# Altium PCB 12V_IdealDiode_PowerSupply_v1.PcbDoc
Units mil, origin at the board's own origin, x right, y up, seen from the top; angles counter-clockwise.
Board outline 6000 x 4000 mil, 2 copper layers (Top Layer, Bottom Layer); 15 components, 10 nets, 58 pads, 0 vias.
Unrouted connection lines stored in the file: 40.
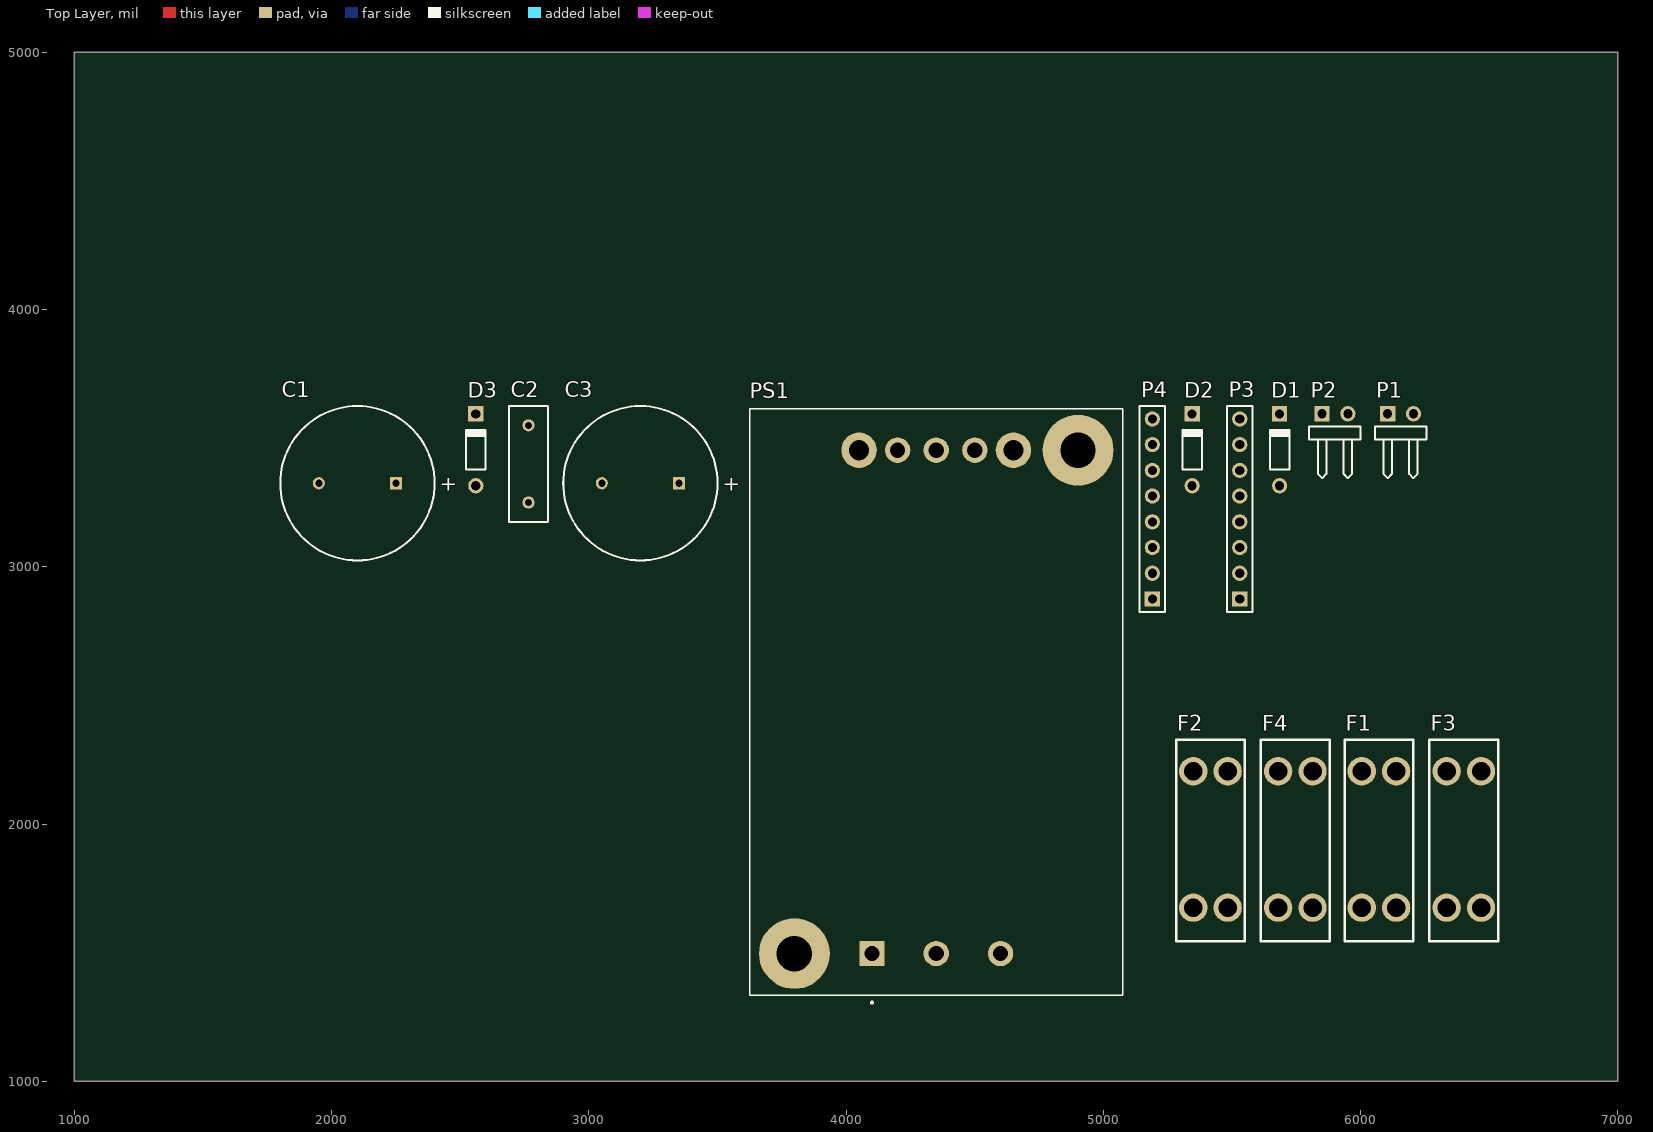
[diagram p0: Top Layer view]
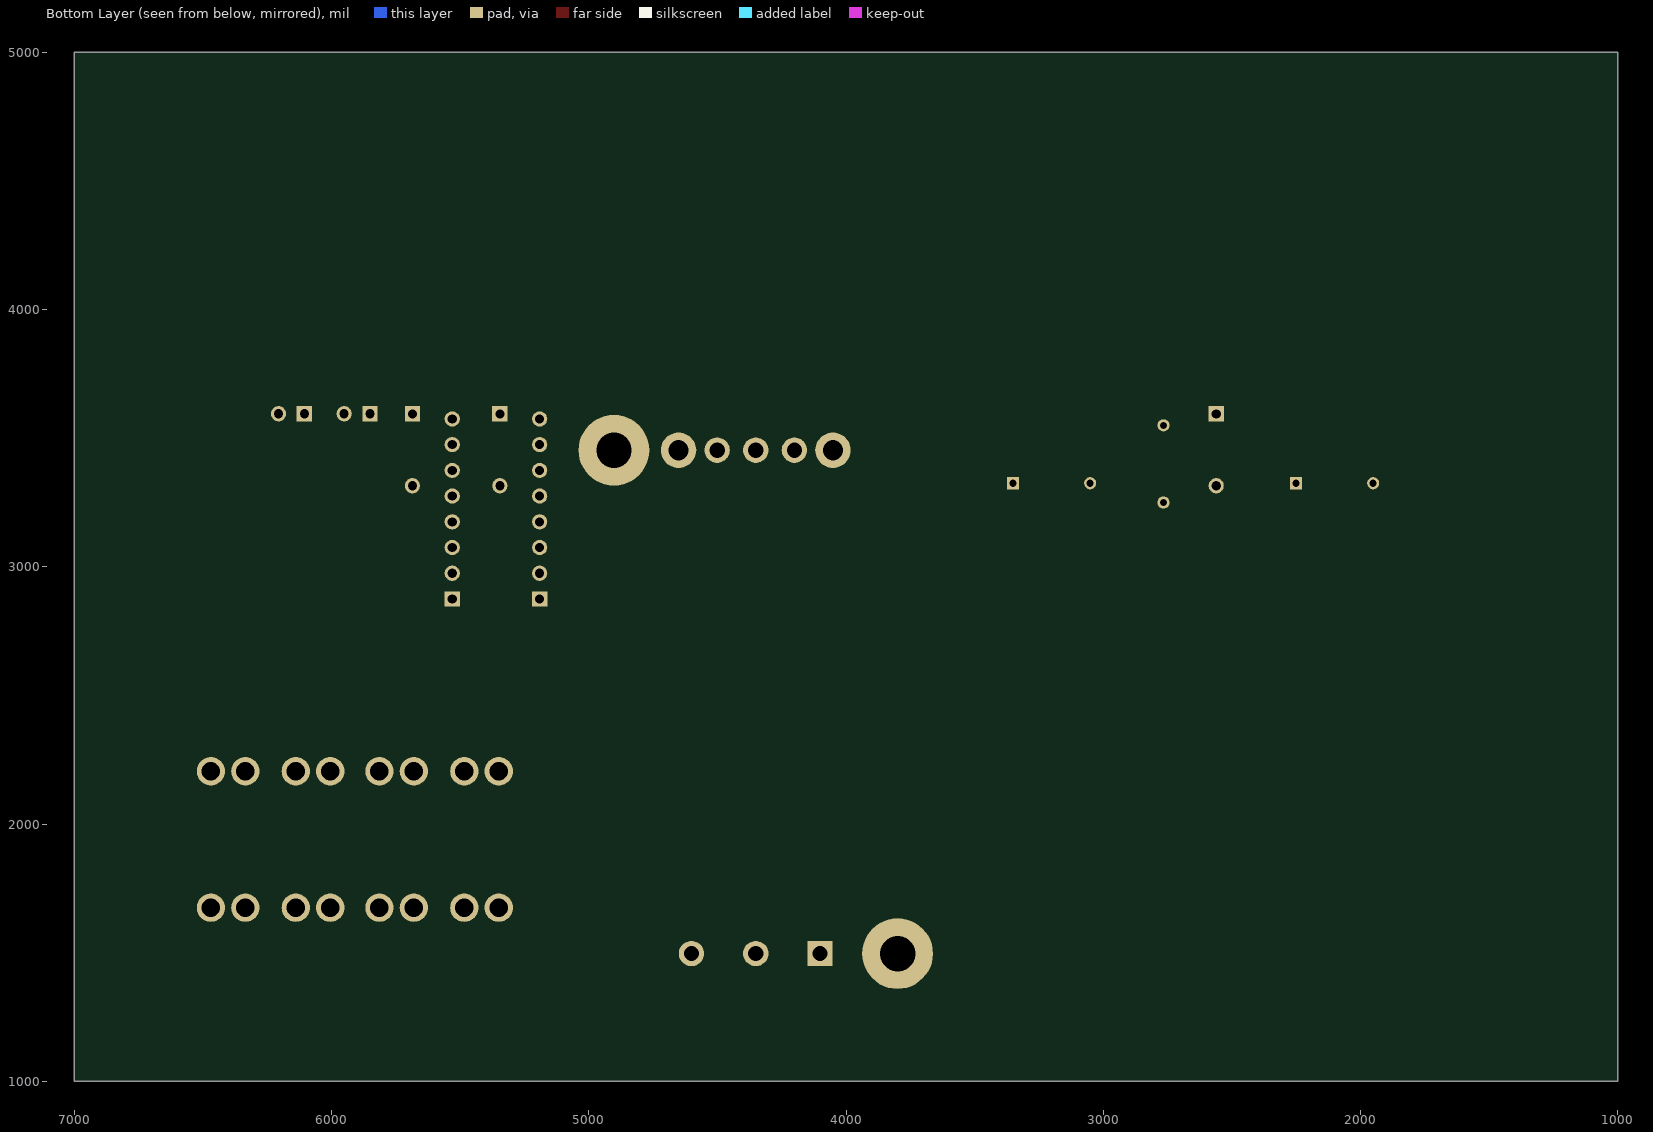
[diagram p1: Bottom Layer view, seen from below]

## Layer stack, top to bottom
Top Solder: solder mask 0.4, Solder Resist, Dk 3.5
Top Layer: signal copper 1.4
Dielectric 1: dielectric 12.6, FR-4, Dk 4.8
Bottom Layer: signal copper 1.4
Bottom Solder: solder mask 0.4, Solder Resist, Dk 3.5

## Board outline
1000,1000 7000,1000 7000,5000 1000,5000

## Design rules (kind name [scope] priority, off if disabled: settings)
Clearance [All] p1: gap=10 ignorepadtopadclearanceinfootprint=FALSE except(0: Arc-Hole Track-Hole SMDPad-Hole THPad-Hole Via-Hole Fill-Hole Poly-Hole Region-Hole Text-Hole)
PolygonConnect [All] p1: connectstyle=Relief reliefconductorwidth=10 reliefentries=4 polygonreliefangle="90 Angle" airgapwidth=10
RoutingVias [All] p1: holewidth=28 width=50 viastyle="Through Hole" minholewidth=28 minwidth=50 maxholewidth=28 maxwidth=50
SolderMaskExpansion [All] p1: expansion=4 istentingtop=FALSE
Width [All] p1: maxlimit=10 minlimit=10 preferedwidth=10
30 further rules are at their usual default settings.

## Components (designator, comment, footprint, x,y, rotation, side; value= is the part's Value field where it differs from the comment)
C1 "Cap Pol1" RB7.6-15 2100.79,3324.76 r0 top value=47uF
C2 "Cap" RAD-0.3 2765.79,3399.76 r90 top value=2.2uF
C3 "Cap Pol1" RB7.6-15 3200.79,3324.76 r0 top value=470uF
D1 "Diode 1N4148" DO-35 5685.79,3454.76 r90 top
D2 "Diode 1N4148" DO-35 5345.79,3454.76 r90 top
D3 "Diode 1N4148" DO-35 2560.79,3454.76 r90 top
F1 "Fuse" "Fuse Hilder" 6205.79,1544.76 r90 top
F2 "Fuse" "Fuse Hilder" 5550.79,1544.76 r90 top
F3 "Fuse" "Fuse Hilder" 6535.79,1544.76 r90 top
F4 "Fuse" "Fuse Hilder" 5880.79,1544.76 r90 top
P1 "Vmain" HDR1X2H 6105.79,3594.76 r0 top
P2 "VSupp" HDR1X2H 5850.79,3594.76 r0 top
P3 "Header 8" HDR1X8 5530.79,2874.76 r90 top
P4 "Header 8" HDR1X8 5190.79,2874.76 r90 top
PS1 "CN100A110-12" CONV_CN100A110-12 4350.79,2474.76 r90 top

## Footprints (in the part's own frame and the unit in brackets; to place one, negate y for a bottom-side part, rotate by r counter-clockwise, add the part's x,y. Pads: shape width x height; smd on the part's side, far side on the other; paste and mask are expansions set on the pad)
CONV_CN100A110-12 [mm]
  rect 2.5x2.5 hole 1.5: 1(-24.85,6.35)
  round 2.5 hole 1.5: 2(-24.85,0) 3(-24.85,-6.35) 5(24.85,-3.81) 6(24.85,0) 7(24.85,3.81)
  round 3.5 hole 2: 4(24.85,-7.62) 8(24.85,7.62)
  round 7 hole 3.5: S1(-24.85,14) S2(24.85,-14)
  silkscreen extent -29.8,-18.4 28.95,18.4, body extent -28.95,-18.4 28.95,18.4, height 13.2
DO-35 [mm] "Diode, Axial; Body 3.8 x 1.9 mm (LxDia. max), Lead Dia. 0.53 mm (max)"
  round 1.5 hole 0.9: 1(-3.55,0)
  rect 1.5x1.5 hole 0.9: 2(3.55,0)
  silkscreen extent -1.95,-0.95 2.05,0.95
"Fuse Hilder" [mil]
  round 110 hole 72: 1(129.92,66.93) 1(129.92,200.79) 2(660.24,66.93) 2(660.24,200.79)
  silkscreen extent 0,0 783,268
HDR1X2H [mm] "Connector; Header; 2 Position; Right Angle"
  rect 1.5x1.5 hole 0.9: 1(0,0)
  round 1.5 hole 0.9: 2(2.54,0)
  silkscreen extent -1.27,-6.35 3.81,-1.27
HDR1X8 [mm] "Connector; Header; 8 Position"
  rect 1.5x1.5 hole 0.9: 1(0,0)
  round 1.5 hole 0.9: 2(2.54,0) 3(5.08,0) 4(7.62,0) 5(10.16,0) 6(12.7,0) 7(15.24,0) 8(17.78,0)
  silkscreen extent -1.27,-1.27 19.05,1.27
RAD-0.3 [mm] "Radial Cap, Thru-Hole; 2 Leads; 0.3 in Pin Spacing"
  round 1.2 hole 0.7: 1(-3.81,0) 2(3.81,0)
  silkscreen extent -5.71,-1.91 5.71,1.91
RB7.6-15 [mm] "Polarized Capacitor (Radial); 2 Leads"
  rect 1.2x1.2 hole 0.7: 1(3.81,0)
  round 1.2 hole 0.7: 2(-3.81,0)
  silkscreen extent -7.62,-7.62 7.62,7.62

## Part data
C1 C3: "Polarized Capacitor (Radial)", LatestRevisionDate=17-Jul-2002, LatestRevisionNote="Re-released for DXP Platform.", PackageDescription="Polarized Capacitor (Radial); 2 Leads", PackageReference=RB7.6-15, Published=8-Jun-2000, Publisher="Altium Limited"
C2: "Ceramic Capacitor", LatestRevisionDate=17-Jul-2002, LatestRevisionNote="Re-released for DXP Platform.", PackageDescription="Radial Cap, Thru-Hole; 2 Leads; 0.3 in Pin Spacing", PackageReference=RAD-0.3, Published=8-Jun-2000, Publisher="Altium Limited"
D1 D2 D3: "High Conductance Fast Diode", Code_JEDEC=DO-204-AH, ComponentLink1Description="Manufacturer Link", ComponentLink1URL=http://www.fairchildsemi.com/, ComponentLink2Description=Datasheet, ComponentLink2URL=http://www.fairchildsemi.com/ds/1N%2F1N4148.pdf, DatasheetVersion=1997, LatestRevisionDate=17-Jul-2002, LatestRevisionNote="Re-released for DXP Platform.", PackageDescription="Diode, Axial; Body 3.8 x 1.9 mm (LxDia. max), Lead Dia. 0.53 mm (max)", PackageReference=DO-35, Published=8-Jun-2000, Publisher="Altium Limited"
P1 P2: library part "Header 2H", "Header, 2-Pin, Right Angle", LatestRevisionDate=17-Jul-2002, LatestRevisionNote="Re-released for DXP Platform.", Publisher="Altium Limited"
P3 P4: "Header, 8-Pin", LatestRevisionDate=17-Jul-2002, LatestRevisionNote="Re-released for DXP Platform.", Publisher="Altium Limited"
PS1: "Isolated Module DC DC Converter 1 Output 12V - - 8.4A 60V - 160V Input", Package="DIP-9 TDK-Lambda Americas Inc", Availability="In Stock", Check_prices=https://www.snapeda.com/parts/CN100A110-12/TDK-Lambda+Americas+Inc/view-part/?ref=eda, MF="TDK-Lambda Americas Inc", MP=CN100A110-12, Price=None, Purchase-URL=https://pricing.snapeda.com/search/part/CN100A110-12/?ref=eda, SnapEDA_Link=https://www.snapeda.com/parts/CN100A110-12/TDK-Lambda+Americas+Inc/view-part/?ref=snap

## Nets (pads, with @x,y where several pads share a name; then routed paths per layer and width w, separated by ;. In a path a pad name is that pad's centre, name@x,y a point inside that pad or via, vN(x,y) a via of type N, cw(c..) or ccw(c..) an arc to the next point about the centre after c; other vN are vias at no path point)
12VM: D2.1 F3.2 P3.8 P4.4 P4.5 P4.6
12VT: F4.2 P3.7 P4.1 P4.2 P4.3
BattGND: C1.2 D3.1 P1.2 P2.2 PS1.2 PS1.3
GND: C2.1 C3.2 P3.3 P4.7 P4.8 PS1.4 PS1.5
Pre12VM: C2.2 C3.1 F3.1 PS1.7 PS1.8
Pre12VT: D1.2 D2.2 F4.1
PreVm: F1.1 P1.1
PreVs: F2.1 P2.1
Vm: C1.1 D3.2 F1.2 PS1.1
Vs: D1.1 F2.2
pads on no net: P3.1 P3.2 P3.4 P3.5 P3.6 PS1.6 PS1.S1 PS1.S2

## Text inside footprints (layer, text, board x,y; h text height)
C1: Top Overlay "+" at 2420.94,3295.76 h59.06
C3: Top Overlay "+" at 3520.94,3295.76 h59.06